# Altium PCB ICtester.PcbDoc
Units mm, origin at the board's own origin, x right, y up, seen from the top; angles counter-clockwise.
Board outline 80 x 137 mm, 2 copper layers (Top Layer, Bottom Layer); 62 components, 66 nets, 300 pads, 47 vias.
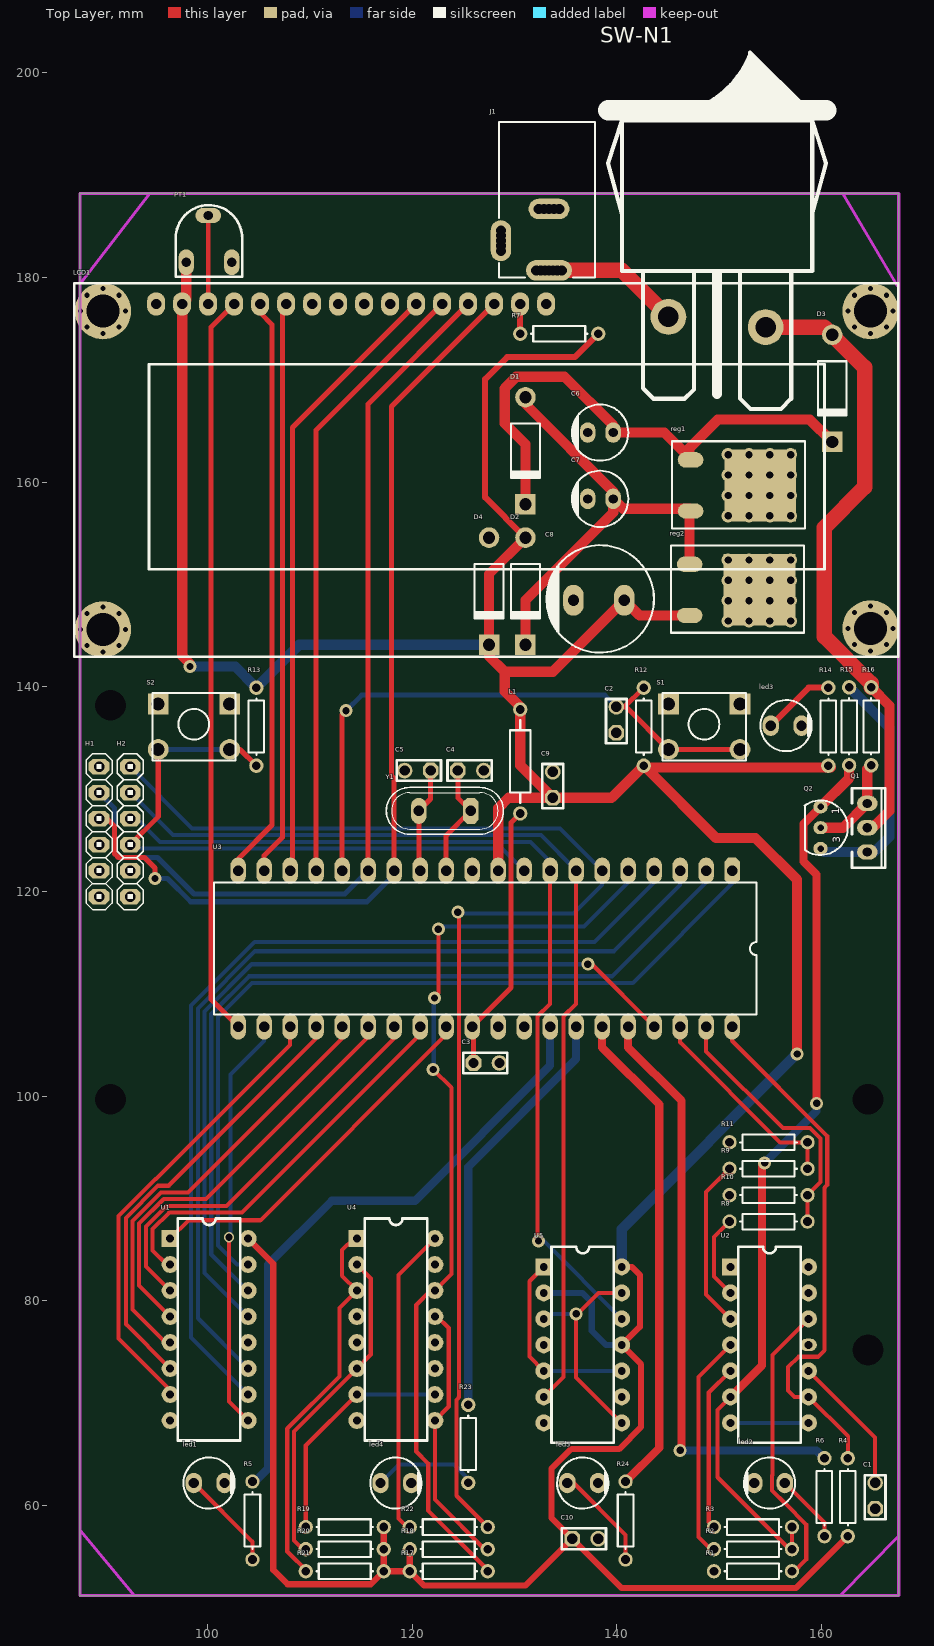
[diagram p0: Top Layer view]
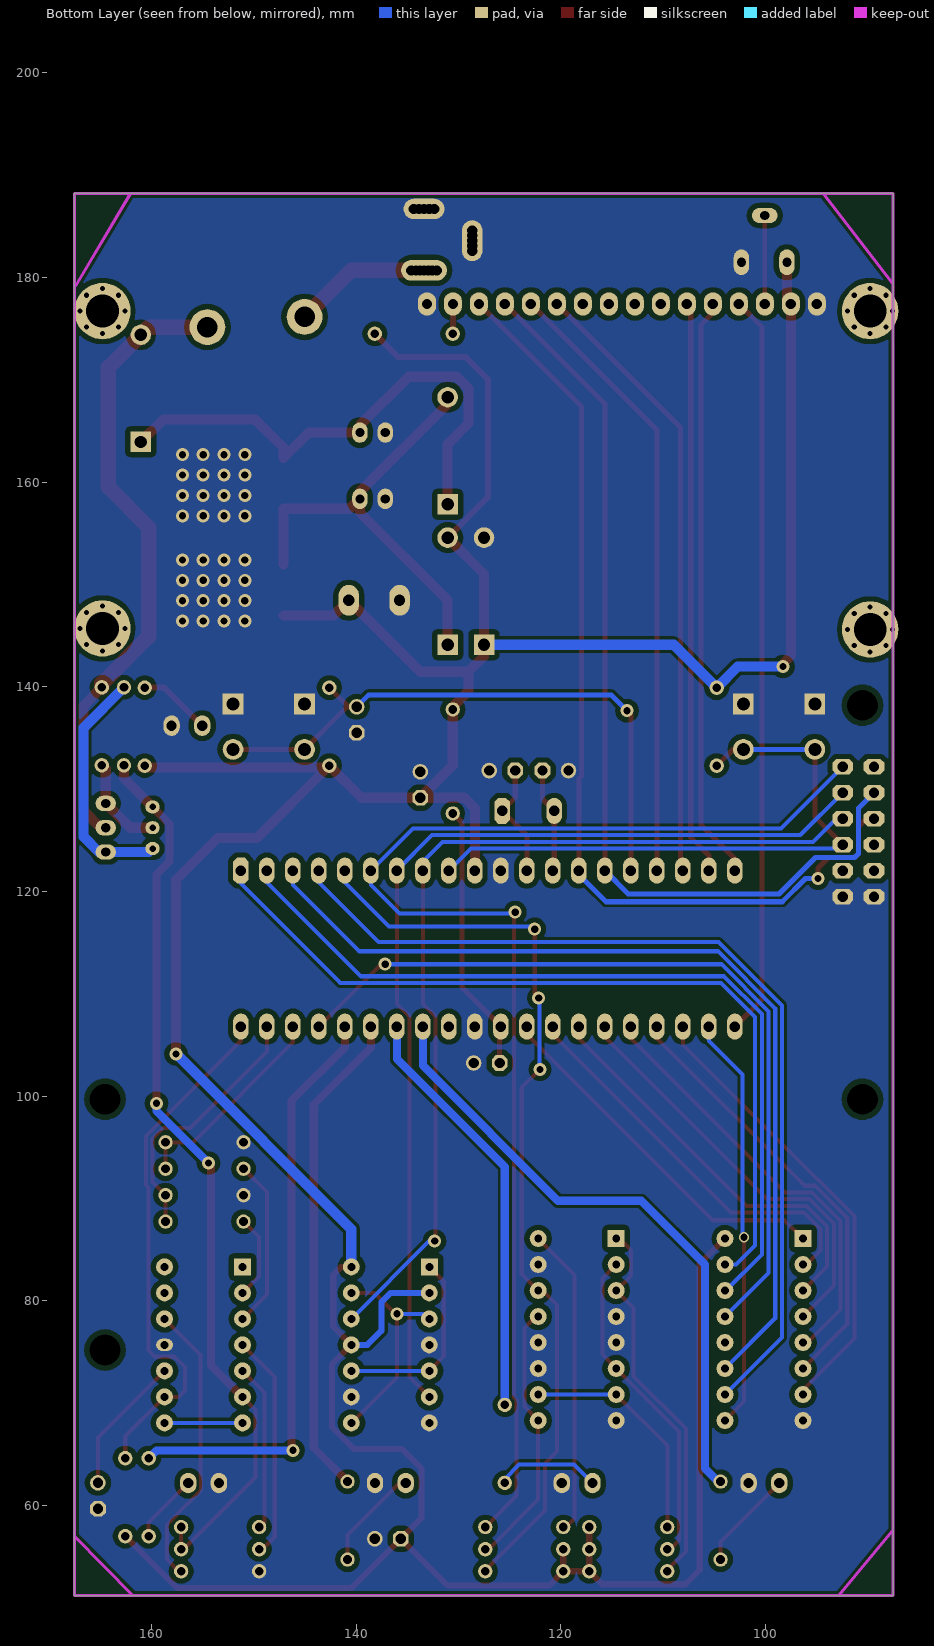
[diagram p1: Bottom Layer view, seen from below]

## Layer stack, top to bottom
Top Solder: solder mask 0.0102, Solder Resist, Dk 3.5
Top Layer: signal copper 0.0356
Dielectric 1: dielectric 0.32, FR-4, Dk 4.8
Bottom Layer: signal copper 0.0356
Bottom Solder: solder mask 0.0102, Solder Resist, Dk 3.5

## Board outline
87.533,51.211 167.533,51.211 167.533,188.211 87.533,188.211

## Design rules (kind name [scope] priority, off if disabled: settings)
Clearance [All] p1: gap=0.254 ignorepadtopadclearanceinfootprint=FALSE except(0: Arc-Hole Track-Hole SMDPad-Hole THPad-Hole Via-Hole Fill-Hole Poly-Hole Region-Hole Text-Hole; 0.3: Arc-Fill Arc-Poly Arc-Region Track-Fill Track-Poly Track-Region; 0.4: SMDPad-Fill SMDPad-Poly SMDPad-Region; 0.5: THPad-Fill THPad-Poly THPad-Region Via-Fill Via-Poly Via-Region)
Height [All] p1 off: minheight=0 maxheight=25.4 prefheight=12.7
PolygonConnect [All] p1: connectstyle=Direct reliefconductorwidth=0.254 reliefentries=4 polygonreliefangle="90 Angle" airgapwidth=0.254
RoomDefinition power2 [InComponentClass('power2')] p1 off: confinementstyle=ConfineIn formatcopy=TRUE lockcomponents=FALSE outline 168.783,163.83 283.972,163.83 283.972,182.499 168.783,182.499
RoomDefinition main [InComponentClass('main')] p2 off: confinementstyle=ConfineIn formatcopy=TRUE lockcomponents=FALSE outline 168.656,78.994 397.256,78.994 397.256,162.687 168.656,162.687
RoomDefinition Az_Proj [InComponentClass('Az_Proj')] p3 off: confinementstyle=ConfineIn formatcopy=TRUE lockcomponents=FALSE outline 168.656,52.705 254.889,52.705 254.889,77.597 168.656,77.597
RoutingVias [All] p1: holewidth=0.711 width=1.27 viastyle="Through Hole" minholewidth=0.711 minwidth=1.27 maxholewidth=0.711 maxwidth=1.27
SolderMaskExpansion [All] p1: expansion=0.102 istentingtop=FALSE
Width [All] p1: maxlimit=2 minlimit=0.254 preferedwidth=0.3
29 further rules are at their usual default settings.

## Classes and differential pairs
component class power2: C6 C7 C8 C9 D1 D2 D3 D4 J1 led3 Q1 Q2 R14 R15 R16 reg1 reg2 SW-N1
component class main: C1 C2 C3 C4 C5 H1 H2 L1 LCD1 led1 led2 PT1 R1 R2 R3 R4 R5 R6 R7 R8 R9 R10 R11 R12 R13 S1 S2 U1 U2 U3 Y1
component class Az_Proj: C10 led4 led5 R17 R18 R19 R20 R21 R22 R23 R24 U4 U5

## Components (designator, comment, footprint, x,y, rotation, side; value= is the part's Value field where it differs from the comment)
C1 "Cap-NF" My_cap100n 165.227,60.96 r90 top value=1uf
C2 "Cap-NF" My_cap100n 139.954,136.779 r90 top value=1uF
C3 "Cap-NF" My_cap100n 127.254,103.251 r0 top value=100nF
C4 "Cap-NF" My_cap100n 125.73,131.826 r0 top value=22pF
C5 "Cap-NF" My_cap100n 120.523,131.826 r180 top value=22pF
C6 "Cap-Polar" Cap-Polar-5.5mm 138.364,164.846 r0 top value=100uF
C7 "Cap-Polar" Cap-Polar-5.5mm 138.364,158.369 r0 top value=100F
C8 "Cap-Polar" Cap-Polar-10.5mm 138.363,148.59 r0 top value=1000uF
C9 "Cap-NF" My_cap100n 133.731,130.429 r90 top value=100nF
C10 "Cap2" My_cap100n 136.906,56.769 r0 top value=100nF
D1 "1N4007" DO-41 131.064,163.068 r270 top
D2 "1N4007" DO-41 131.064,149.352 r270 top
D3 "1N4007" DO-41 161.036,169.164 r270 top
D4 "1N4007" DO-41 127.508,149.352 r270 top
H1 "Header 6" My_1X06 89.408,125.857 r90 top
H2 "Header 6" My_1X06 92.456,125.857 r90 top
J1 "DC_Jack" "Power Jack" 133.366,195.19 r270 top locked
L1 "Inductor" AXIAL-0.4 130.556,132.715 r90 top value=10uH
LCD1 "LCD 16X2" "LCD 16x2" 94.983,177.411 r0 top locked
led1 "LED 5mm" LED-5mm 100.158,62.211 r0 top locked
led2 "LED 5mm" LED-5mm 154.908,62.211 r180 top locked
led3 "LED 5mm" LED-5mm 156.533,136.211 r0 top locked
led4 "LED 5mm" LED-5mm 118.408,62.211 r0 top locked
led5 "LED 5mm" LED-5mm 136.658,62.211 r0 top locked
PT1 "POT3" POT3 96.901,180.086 r0 top
Q1 "bd135" SOT-32 162.965,130.113 r270 top
Q2 "C945" C945 159.893,126.238 r90 top
R1 "Res1" AXIAL-0.3 153.289,53.594 r180 top value=82k
R2 "Res1" AXIAL-0.3 153.289,55.753 r180 top value=22k
R3 "Res1" AXIAL-0.3 153.289,57.912 r180 top value=22k
R4 "Res1" AXIAL-0.3 162.56,60.833 r90 top value=10K
R5 "Res1" AXIAL-0.3 104.394,58.547 r270 top value=330
R6 "Res1" AXIAL-0.3 160.274,60.833 r270 top value=330
R7 "Res1" AXIAL-0.3 134.366,174.498 r180 top value=330
R8 "Res1" AXIAL-0.3 154.813,87.757 r180 top value=10K
R9 "Res1" AXIAL-0.3 154.813,92.922 r180 top value=10K
R10 "Res1" AXIAL-0.3 154.813,90.339 r0 top value=10K
R11 "Res1" AXIAL-0.3 154.813,95.504 r0 top value=10K
R12 "Res1" AXIAL-0.3 142.621,136.113 r90 top value=5.6K
R13 "Res1" AXIAL-0.3 104.775,136.113 r90 top value=10K
R14 "Res1" AXIAL-0.3 160.655,136.113 r90 top value=220
R15 "Res1" AXIAL-0.3 162.687,136.144 r270 top value=10
R16 "Res1" AXIAL-0.3 164.846,136.144 r270 top value=1K
R17 "Res1" AXIAL-0.3 123.571,53.594 r180 top value=1K
R18 "Res1" AXIAL-0.3 123.571,55.753 r180 top value=1K
R19 "Res1" AXIAL-0.3 113.411,57.912 r0 top value=1K
R20 "Res1" AXIAL-0.3 113.411,55.753 r0 top value=1K
R21 "Res1" AXIAL-0.3 113.411,53.594 r0 top value=1K
R22 "Res1" AXIAL-0.3 123.571,57.912 r0 top value=1K
R23 "Res1" AXIAL-0.3 125.476,66.04 r270 top value=330
R24 "Res1" AXIAL-0.3 140.843,58.547 r270 top value=330
reg1 "7808" REG-7805-smd 147.193,159.679 r270 top
reg2 "7805" REG-7805-smd 147.099,149.479 r270 top
S1 "Switch PB" "Switch - Push to On" 148.533,136.113 r0 top locked
S2 "Switch PB" "Switch - Push to On" 98.679,136.113 r0 top
SW-N1 "Switch-1 way" "rocker - switch" 149.784,176.149 r180 top locked
U1 "4017" DIP16 100.158,77.211 r0 top locked
U2 "xr8038" DIP14#1 154.908,75.711 r0 top locked
U3 "ATmega16-16PI" My_40P6 127.127,114.427 r180 top
U4 "CA3083" DIP16 118.408,77.211 r0 top locked
U5 "CD4007CN" DIP14#2 136.658,75.711 r0 top locked
Y1 "CRYSTAL" My_Crystal 123.19,127.889 r180 top

## Footprints (in the part's own frame and the unit in brackets; to place one, negate y for a bottom-side part, rotate by r counter-clockwise, add the part's x,y. Pads: shape width x height; smd on the part's side, far side on the other; paste and mask are expansions set on the pad)
AXIAL-0.3 [mm] "Axial Device, Thru-Hole; 2 Leads; 0.3 in Pin Spacing"
  round 1.4 hole 0.85: 1(-3.81,0) 2(3.81,0)
  silkscreen extent -2.77,-0.76 2.77,0.76
AXIAL-0.4 [mm] "Axial Device, Thru-Hole; 2 Leads; 0.4 in Pin Spacing"
  round 1.4 hole 0.85: 1(-5.08,0) 2(5.08,0)
  silkscreen extent -4.06,-1.02 4.06,1.02
C945 [mil] "NPN Transistor"
  oval 50x55 hole 25: 1(80,0) 2(0,0) 3(-80,0)
  silkscreen extent -105,-105 105,61, body extent -94,-96 95,58, height 315
Cap-Polar-5.5mm [mm]
  oval 1.5x2 hole 0.9: 1(-1.21,0) 2(1.27,0)
  silkscreen extent -2.75,-2.75 2.75,2.75
Cap-Polar-10.5mm [mm]
  oval 2x3 hole 1.1: 1(-2.607,-0.127) 2(2.353,-0.127)
  silkscreen extent -5.25,-5.25 5.25,5.25
DIP14#1 [mil]
  rect 65x65 hole 30: 1(-150,300)
  round 65 hole 30: 2(-150,200) 3(-150,100) 4(-150,0) 5(-150,-100) 6(-150,-200) 7(-150,-300) 8(150,-300) 9(150,-200) 10(150,-100) 12(150,100) 13(150,200) 14(150,300)
  oval 65x47.24 hole 30: 11(150,0)
  silkscreen extent -120,-377 120,377, body extent -155,-384 155,384, height 200
DIP14#2 [mil]
  rect 65x65 hole 30: 1(-150,300)
  round 65 hole 30: 2(-150,200) 3(-150,100) 4(-150,0) 5(-150,-100) 6(-150,-200) 7(-150,-300) 8(150,-300) 9(150,-200) 10(150,-100) 11(150,0) 12(150,100) 13(150,200) 14(150,300)
  silkscreen extent -120,-377 120,377, body extent -155,-384 155,384, height 200
DIP16 [mil]
  rect 65x65 hole 30: 1(-150,350)
  round 65 hole 30: 2(-150,250) 3(-150,150) 4(-150,50) 5(-150,-50) 6(-150,-150) 7(-150,-250) 8(-150,-350) 9(150,-350) 10(150,-250) 11(150,-150) 12(150,-50) 13(150,50) 14(150,150) 15(150,250) 16(150,350)
  silkscreen extent -120,-427 120,427, body extent -155,-394 155,394, height 200
DO-41 [mm] "Diode, Axial; Body 5.2 x 2.7 mm (LxDia. max), Lead Dia. 0.86 mm (max)"
  round 2 hole 1.2: 1(-5.23,0)
  rect 2x2 hole 1.2: 2(5.23,0)
  silkscreen extent -2.65,-1.4 2.75,1.4
"LCD 16x2" [mm] "Character LCD, 2 Row, 16 Colunm"
  oval 1.778x2.286 hole 1.016: 1(0,0) 2(2.54,0) 3(5.08,0) 4(7.62,0) 5(10.16,0) 6(12.7,0) 7(15.24,0) 8(17.78,0) 9(20.32,0) 10(22.86,0) 11(25.4,0) 12(27.94,0) 13(30.48,0) 14(33.02,0) 15(35.56,0) 16(38.1,0)
  round 0.6 hole 0.5: MH(-7.4,-31.8) MH(-7.4,-0.7) MH(-6.756,-33.356) MH(-6.756,-30.244) MH(-6.756,-2.256) MH(-6.756,0.856) MH(-5.2,-34) MH(-5.2,-29.6) MH(-5.2,-2.9) MH(-5.2,1.5) MH(-3.644,-33.356) MH(-3.644,-30.244) MH(-3.644,-2.256) MH(-3.644,0.856) MH(-3,-31.8) MH(-3,-0.7) MH(67.6,-31.7) MH(67.6,-0.7) MH(68.244,-33.256) MH(68.244,-30.144) MH(68.244,-2.256) MH(68.244,0.856) MH(69.8,-33.9) MH(69.8,-29.5) MH(69.8,-2.9) MH(69.8,1.5) MH(71.356,-33.256) MH(71.356,-30.144) MH(71.356,-2.256) MH(71.356,0.856) MH(72,-31.7) MH(72,-0.7)
  round 5.5 hole 3.2: MH(-5.2,-31.8) MH(-5.2,-0.7) MH(69.8,-31.7) MH(69.8,-0.7)
  silkscreen extent -7.99,-34.47 72.51,2.03, body extent -7.99,-34.47 72.51,2.03, height 25.52
LED-5mm [mm]
  oval 1.6x2 hole 1: 1(-1.5,0) 2(1.5,0)
  silkscreen extent -2.5,-2.5 2.5,2.5, body extent -2.47,-3.05 2.98,2.85, height 10.1
My_1X06 [mil]
  oct 60x80 hole 40: 1(-250,0) 2(-150,0) 3(-50,0) 4(50,0) 5(150,0) 6(250,0)
  silkscreen extent -300,-50 300,50
My_40P6 [mil]
  oct 60x100 hole 40: 1(-950,-300)
  oval 60x100 hole 40: 2(-850,-300) 3(-750,-300) 4(-650,-300) 5(-550,-300) 6(-450,-300) 7(-350,-300) 8(-250,-300) 9(-150,-300) 10(-50,-300) 11(50,-300) 12(150,-300) 13(250,-300) 14(350,-300) 15(450,-300) 16(550,-300) 17(650,-300) 18(750,-300) 19(850,-300) 20(950,-300) 21(950,300) 22(850,300) 23(750,300) 24(650,300) 25(550,300) 26(450,300) 27(350,300) 28(250,300) 29(150,300) 30(50,300) 31(-50,300) 32(-150,300) 33(-250,300) 34(-350,300) 35(-450,300) 36(-550,300) 37(-650,300) 38(-750,300) 39(-850,300) 40(-950,300)
  silkscreen extent -1043,-254 1043,254
My_cap100n [mil]
  oct 60x60 hole 40: 1(-50,0)
  round 60 hole 40: 2(50,0)
  silkscreen extent -90,-40 80,40
My_Crystal [mil]
  oct 60x100 hole 40: 1(-100,0)
  oval 60x100 hole 40: 2(100,0)
  silkscreen extent -225,-90 225,90
POT3 [mm]
  oval 1.5x2.5 hole 0.9: 1(1.016,1.397) 2(5.461,1.397)
  oval 2.5x1.5 hole 0.9: 3(3.175,5.969)
  silkscreen extent 0,0 6.48,6.98
"Power Jack" [mm] "Power Adaptor Jack"
  round 1.5 hole 1: 1(14.5,-1.25) 1(14.5,-0.8) 1(14.5,-0.4) 1(14.5,0.4) 1(14.5,0.8) 1(14.5,1.25) 2(8.5,-1) 2(8.5,1) 2(8.5,-0.5) 2(8.5,0.5) 3(10.6,-4.7) 3(11.1,-4.7) 3(12.1,-4.7) 3(12.6,-4.7)
  oval 2x4.5 hole 1: 1(14.5,0)
  oval 2x4 hole 1: 2(8.5,0)
  oval 4x2 hole 1: 3(11.6,-4.7)
  silkscreen extent 0,-4.9 15.2,4.5, body extent 0,-4.9 15.2,4.5, height 11
REG-7805-smd [mm]
  oval 1.5x2.5 smd: 1(-2.5,0) 3(2.5,0)
  rect 7x7 smd: 2(0,6.825)
  silkscreen extent -4.32,-1.82 4.19,11.18
"rocker - switch" [mm]
  round 3.5 hole 2: 1(-4.75,1) 2(4.75,0)
  silkscreen extent -10.65,-25.84 10.65,9
SOT-32 [mm]
  oval 1.5x2 hole 0.9: B(6.25,1.5) C(3.875,1.5) E(1.5,1.5)
  silkscreen extent 0,0 7.8,3.25
"Switch - Push to On" [mil]
  rect 80x80 hole 50: 1(-137.5,87.5) 1(137.5,87.5)
  round 80 hole 50: 2(-137.5,-87.5) 2(137.5,-87.5)
  silkscreen extent -160,-130 160,130, body extent -155,-121 157,123, height 205

## Part data
C1 C2 C3 C4 C5 C9 C10: "Capacitor", Publisher="Altium Limited"
  C1 C2 C3 C4 C5 C9: LatestRevisionDate=17-Jul-2002, LatestRevisionNote="Re-released for DXP Platform.", PackageReference=RAD-0.3, Published=8-Jun-2000
  C10: PackageDescription="Capacitor; 2 Leads", PackageReference=CAPR5-4X5, Published=23-Sep-2002
C6 C7 C8: "Polarized Capacitor (Axial)", LatestRevisionDate=17-Jul-2002, LatestRevisionNote="Re-released for DXP Platform.", PackageReference=POLAR0.8, Published=8-Jun-2000, Publisher="Altium Limited"
D1 D2 D3 D4: "1 Amp Diode"
H1 H2: "Header, 6-Pin", LatestRevisionDate=17-Jul-2002, LatestRevisionNote="Re-released for DXP Platform.", Publisher="Altium Limited"
J1: PackageDocument=2003, ComponentLink1Description="Manufacturer Link", ComponentLink1URL=http://www.cliffuk.co.uk/, DatasheetDocument=2003, DrillAndSlotSize="Corresponds to nominal value.", LatestRevisionDate=15-Jul-2004, LatestRevisionNote="Component Replaced & renamed from \"Phonejack\".", PackageReference=S1VS_SNB, PCB_Layout="Complies with manufacturer's recommendation.", Publisher="Altium Limited"
LCD1: "LCD 16X2 Character lcd"
led1 led2 led3 led4 led5: "Typical LED", Designer="Seyed Mohsen Ghasemian", PackageDescription="LED; 2 Leads", PackageReference=LED, Published=07/31/2012, Publisher=www.picpars.com
PT1: "Variable Potentiometer top adjust", Designer="Seyed Mohsen Ghasemian", WEB=www.picpars.com
Q1: library part C945, "NPN Transistor", Company="IPA CO", Designer="Saeid Jorablo", Last Update Time=2008/08/04
Q2: "NPN Transistor", Company="IPA CO", Designer="Saeid Jorablo", Last Update Time=2008/08/04
R1 R2 R3 R4 R5 R6 R7 R8 R9 R10 R11 R12 R13 R14 R15 R16 R17 R18 R19 R20 R21 R22 R23 R24: "Resistor", LatestRevisionDate=17-Jul-2002, LatestRevisionNote="Re-released for DXP Platform.", PackageDescription="Axial Device, Thru-Hole; 2 Leads; 0.3 in Pin Spacing", PackageReference=AXIAL-0.3, Published=8-Jun-2000, Publisher="Altium Limited"
reg1: library part 7805, "Regulator"
reg2: "Regulator"
S1 S2: "Push Button Switch"
U3: "AVR 16K Bytes of In-System Programmable Flash Memory", ComponentLink1Description="Manufacturer Link", ComponentLink1URL=http://www.atmel.com, ComponentLink2Description=Datasheet, ComponentLink2URL=http://www.atmel.com/dyn/resources/prod_documents/doc2466.pdf, DatasheetVersion=2466E-AVR-10/02, LatestRevisionDate=04-Mar-2005, LatestRevisionNote="Stylized 3D Model Added.", PackageDescription="DIP; 40 Leads; Row Spacing 15.24 mm; Pitch 2.54 mm", PackageReference=40P6, PackageVersion=Dec-1999, Published=17-Sep-2003, Publisher="Altium Limited"
U5: "Dual Complementary Pair Plus Inverter", ComponentLink1Description="Manufacturer Link", ComponentLink1URL=http://www.fairchildsemi.com/, DatasheetVersion=Jan-1999, LatestRevisionDate=29-May-2009, LatestRevisionNote="Component Body Added.", PackageDescription="DIP, 14-Pin, Row Spacing 7.62 mm, Pitch 2.54 mm", PackageReference=N14A, PackageVersion=2000, Published=17-Jul-2002, Publisher="Altium Limited"
Y1: "Crystal"
L1: Code_IEC=1005, Code_JEITA=0402, LatestRevisionDate=29-May-2009, LatestRevisionNote="IPC-7351 Footprint Added.", PackageDescription="Chip Inductor", PackageReference=0402-A, Published=8-Jun-2000, Publisher="Altium Limited"

## Free pads (board coordinates)
  round 0 hole 3: sc(90.533,99.711) sc(90.533,138.211) sc(164.533,75.211) sc(164.533,99.711)

## Via types
v1: diameter 1.27, hole 0.711, Top Layer to Bottom Layer, tented both sides, 46 vias
v2: diameter 1, hole 0.711, Top Layer to Bottom Layer, tented both sides, 1 vias

## Nets (pads, with @x,y where several pads share a name; then routed paths per layer and width w, separated by ;. In a path a pad name is that pad's centre, name@x,y a point inside that pad or via, vN(x,y) a via of type N, cw(c..) or ccw(c..) an arc to the next point about the centre after c; other vN are vias at no path point)
12V: D3.1 Q1.C R16.1 SW-N1.1 | length 61.7
  Top Layer w1: Q1.C 164.978,126.238 166.629,127.889 166.629,138.171 R16.1
  Top Layer w1.5: SW-N1.1 160.281,175.149 D3.1 164.211,171.219 164.211,159.512 160.274,155.575 160.274,144.911 164.846,140.339 R16.1
4017_clock: U1.14 U3.2 | length 83.4
  Bottom Layer w0.4: U1.14 103.891,81.021 100.365,84.547 100.365,108.021 104.069,111.725 139.538,111.725 148.717,120.904 U3.2
4017_en: U1.13 U3.37 | length 79.9
  Top Layer w0.4: v1(137.16,112.903) 137.541,112.903 U3.37
  Bottom Layer w0.4: U1.13 99.711,82.738 99.711,108.292 104.322,112.903 v1(137.16,112.903)
4017_reset: U1.15 U3.1 | length 83
  Bottom Layer w0.4: U1.15 102.875,83.561 101.019,85.417 101.019,107.75 104.34,111.071 141.551,111.071 151.257,120.777 U3.1
B2: R21.1 U4.1 U4.3 | length 37.9
  Top Layer w0.4: R21.1@109.855,53.213 109.855,53.467 107.793,55.529 107.793,67.521 112.903,72.631 112.903,79.326 U4.3 113.157,82.462 113.157,84.963 114.295,86.101 U4.1
B3: R20.1 U4.2 U4.6 | length 32.3
  Top Layer w0.4: R20.1@109.601,55.435 108.447,56.59 108.447,67.25 U4.6 115.951,74.754 115.951,82.208 U4.2
B4: R19.1 U4.7 U4.10 | length 22.6
  Top Layer w0.4: R19.1 109.601,65.864 U4.7
  Bottom Layer w0.4: U4.7 U4.10
B5: R18.1 U4.9 U4.13 | length 26.4
  Top Layer w0.4: U4.13 122.433,78.481 123.571,77.343 123.571,69.674 U4.9 122.218,60.598 R18.1@127.381,55.435
B135: Q1.E Q2.2 R16.2 | length 9.4
  Top Layer w1: Q2.2 162.088,126.238 164.463,128.613 Q1.E 164.465,131.953 R16.2
D1: LCD1.11 U3.18 | length 60.5
  Top Layer w0.5: U3.18 108.315,122.285 108.315,165.343 LCD1.11
D2: LCD1.12 U3.17 | length 60.5
  Top Layer w0.5: U3.17 110.617,165.105 LCD1.12
D3: H1.5 LCD1.13 U3.15 | length 93.4
  Top Layer w0.5: U3.15 115.697,167.645 LCD1.13
  Bottom Layer w0.5: H1.5 90.932,128.143 90.932,123.698 91.313,123.317 95.123,123.317 98.679,119.761 113.411,119.761 U3.15
D4: H1.4 LCD1.14 U3.14 | length 95.2
  Top Layer w0.5: H1.4 89.789,127.508 90.932,126.365 90.932,123.698 91.313,123.317 93.095,123.317 93.091,123.321 93.849,123.321 94.869,122.301 v1(94.869,121.285) ; U3.14 118.237,131.052 117.987,131.302 117.987,167.395 LCD1.14
  Bottom Layer w0.5: v1(94.869,121.285) 96.089,121.285 98.367,119.007 115.578,119.007 117.856,121.285 U3.14@117.856,121.666
E135: Q1.B Q2.3 R15.1 | length 23.7
  Bottom Layer w1: Q2.3 160.236,123.863 Q1.B 165.138,123.863 166.629,125.354 166.629,136.012 R15.1
En: LCD1.6 U3.19 | length 56.4
  Top Layer w0.5: U3.19 105.537,123.521 107.315,125.299 107.315,177.038 LCD1.6@107.823,177.546
GND: C1.1 C2.1 C3.2 C4.2 C5.2 C6.1 C7.1 C8.1 C9.2 C10.2 D4.1 H1.1 H2.1 J1.2 J1.3 LCD1.1 LCD1.16 led1.2 led2.2 led3.2 led4.2 led5.2 PT1.2 R1.2 R10.1 R11.1 reg1.2 reg2.2 S1.1 S2.1 U1.8 U2.11 U3.11 U3.31 U4.4 U4.5 U4.8 U4.11 U4.12 U4.15 U5.4 U5.7 U5.9
  other v1: 150.876,146.431 152.908,146.431 154.94,146.431 156.972,146.431 150.876,148.421 152.908,148.421 154.94,148.421 156.972,148.421 150.876,150.41 152.908,150.41 154.94,150.41 156.972,150.41 150.876,152.4 152.908,152.4 154.94,152.4 156.972,152.4 150.876,156.718 152.908,156.718 154.94,156.718 156.972,156.718 150.876,158.708 152.908,158.708 154.94,158.708 156.972,158.708 150.876,160.697 152.908,160.697 154.94,160.697 156.972,160.697 150.876,162.687 152.908,162.687 154.94,162.687 156.972,162.687
Input1: H2.6 R22.2 U3.6 | length 128.5
  Top Layer w0.4: v1(124.46,117.983) 124.587,117.856 124.587,70.593 124.322,70.328 124.322,60.971 R22.2
  Bottom Layer w0.4: H2.6 98.498,126.165 134.439,126.165 U3.6 138.557,120.65 135.763,117.856 124.587,117.856 v1(124.46,117.983)
Input2: H2.5 U3.7 U5.6 | length 99.5
  Top Layer w0.4: U5.6 134.801,72.584 134.801,107.819 136.017,109.035 U3.7
  Bottom Layer w0.4: H2.5 96.612,125.511 132.588,125.511 136.017,122.082 U3.7
led_u1: R5.1 U3.33 | length 61.4
  Bottom Layer w0.8: R5.1 104.648,62.357 105.918,63.627 105.918,83.566 112.141,89.789 120.269,89.789 133.477,102.997 U3.33
led_u2: R6.1 U3.36 | length 58
  Top Layer w0.8: U3.36 141.097,104.775 146.304,99.568 146.304,65.532 v1(146.177,65.405)
  Bottom Layer w0.8: v1(146.177,65.405) 159.512,65.405 R6.1
led_u3: R23.1 U3.34 | length 41.3
  Bottom Layer w0.8: R23.1 125.476,93.091 136.017,103.632 U3.34
led_u4: R24.1 U3.35 | length 48.1
  Top Layer w0.8: U3.35 138.557,104.775 144.145,99.187 144.145,65.659 R24.1
N1: U5.3 U5.8 U5.13 | length 21.2
  Top Layer w0.4: U5.8 136.017,72.542 v1(136.017,78.74) 136.144,78.74 138.195,80.791 U5.13
  Bottom Layer w0.4: U5.3 133.337,78.74 v1(136.017,78.74)
N2: U5.1 U5.5 U5.10 | length 18.9
  Top Layer w0.4: U5.5 131.445,74.574 131.445,81.928 U5.1
  Bottom Layer w0.4: U5.5 U5.10
NetC1_2: C1.2 U2.10 | length 13.6
  Top Layer w0.4: U2.10 165.227,66.662 C1.2
NetC2_2: C2.2 R12.2 S1.2 U3.16 | length 59.7
  Top Layer w0.5: U3.16 113.157,137.287 v1(113.538,137.668) ; C2.2 140.747,138.049 ; R12.2 140.747,138.049 ; S1.2@152.025,133.89 145.04,133.89 140.882,138.049 140.747,138.049
  Bottom Layer w0.5: v1(113.538,137.668) 115.062,139.192 138.811,139.192 C2.2
NetC3_1: C3.1 L1.1 U3.30 | length 26.4
  Top Layer w0.5: C3.1 125.984,106.68 U3.30 129.667,110.617 129.667,126.746 L1.1
NetC4_1: C4.1 U3.12 Y1.1 | length 11.3
  Top Layer w0.5: U3.12 123.317,125.476 Y1.1 124.46,129.159 C4.1
NetC5_1: C5.1 U3.13 Y1.2 | length 10.3
  Top Layer w0.5: U3.13 120.65,122.174 Y1.2 121.793,129.032 C5.1
NetC6_2: C6.2 D1.2 D3.2 reg1.1 | length 51.3
  Top Layer w1: D1.2 131.064,163.703 129.032,165.735 129.032,169.164 130.175,170.307 134.874,170.307 139.634,165.547 C6.2 144.646,164.846 147.099,162.393 147.099,163.355 149.86,166.116 158.854,166.116 D3.2
NetC7_2: C7.2 D1.1 D2.2 reg1.3 reg2.1 | length 44.6
  Top Layer w1: D2.2 131.064,148.463 139.634,157.033 C7.2 ; D1.1 131.064,167.64 139.634,159.07 C7.2 ; reg2.1 147.099,157.393 140.61,157.393 C7.2
NetJ1_1: J1.1 SW-N1.2 | length 13.9
  Top Layer w1.5: J1.1@132.966,180.69 133.366,180.69 133.766,180.69 134.166,180.69 134.616,180.69 140.493,180.69 SW-N1.2
NetLCD1_3: LCD1.3 PT1.3 | length 8.6
  Top Layer w0.4: LCD1.3 100.076,177.424 PT1.3
NetLCD1_15: LCD1.15 R7.2 | length 2.9
  Top Layer w0.6: LCD1.15 130.543,174.511 R7.2
Netled1_1: led1.1 R5.2 | length 9.8
  Top Layer w0.4: led1.1 104.394,56.475 R5.2
Netled2_1: led2.1 R6.2 | length 6.8
  Top Layer w0.4: led2.1 160.274,58.345 R6.2
Netled3_1: led3.1 R14.2 | length 7.2
  Top Layer w0.6: led3.1 158.745,139.923 R14.2
Netled4_1: led4.1 R23.2 | length 10.3
  Bottom Layer w0.4: led4.1 118.705,64.008 124.079,64.008 125.476,62.611 R23.2
Netled5_1: led5.1 R24.2 | length 10.2
  Top Layer w0.4: led5.1 135.782,62.211 140.843,57.15 R24.2
NetR1_1: R1.1 U2.12 | length 28.4
  Top Layer w0.4: R1.1@157.099,53.34 158.496,54.737 158.496,58.166 156.464,60.198 156.448,60.198 155.154,61.492 155.154,62.97 155.194,63.01 155.194,74.727 U2.12
NetR2_2: R2.2 U2.4 | length 22.2
  Top Layer w0.4: R2.2@149.479,55.435 147.955,56.959 147.955,72.568 U2.4
NetR3_2: R3.2 U2.5 | length 16.4
  Top Layer w0.4: R3.2 148.971,58.42 148.971,71.044 U2.5
NetR8_2: R8.2 U2.2 | length 8.3
  Top Layer w0.4: R8.2 149.479,86.233 149.479,82.41 U2.2
NetR9_2: R9.2 U2.3 | length 16.6
  Top Layer w0.4: R9.2 148.717,90.636 148.717,80.632 U2.3
NetR22_1: R22.1 U4.16 | length 30.8
  Top Layer w0.4: R22.1 120.015,58.166 119.253,58.166 118.654,58.765 118.654,82.537 U4.16
NetU2_7: U2.7 U2.8 | length 7.7
  Bottom Layer w0.4: U2.7 158.642,68.091 U2.8@158.75,68.199
Output1: R17.1 U3.5 U4.14 | length 89.3
  Top Layer w0.4: v1(122.047,102.616) 123.825,100.838 123.825,82.628 U4.14 121.807,81.021 120.396,79.61 120.396,65.278 121.564,64.11 121.564,59.538 127.381,53.721 R17.1 ; v1(122.174,109.601) 122.174,109.728 122.555,110.109 v1(122.555,116.332)
  Bottom Layer w0.4: v1(122.047,102.616) 122.101,102.67 122.101,109.528 v1(122.174,109.601) ; v1@122.936,116.586 136.779,116.586 141.097,120.904 U3.5
Output2: H2.4 U3.8 U5.12 | length 91.7
  Top Layer w0.4: v1(132.334,85.852) 132.334,86.233 132.261,86.306 132.261,107.819 133.477,109.035 U3.8
  Bottom Layer w0.4: H2.4 93.091,127.127 95.361,124.857 131.556,124.857 133.477,122.936 U3.8 ; v1(132.334,85.852) 132.867,85.852 U5.12
Q0: U1.3 U3.27 | length 40.3
  Top Layer w0.4: U1.3 93.98,83.389 93.98,87.285 95.995,89.3 101.873,89.3 118.237,105.664 U3.27
Q1: U1.2 U3.28 | length 39.1
  Top Layer w0.4: U1.2 96.017,83.561 94.634,84.944 94.634,87.014 96.266,88.646 103.378,88.646 120.777,106.045 U3.28
Q2: U1.4 U3.26 | length 41.3
  Top Layer w0.4: U1.4 93.326,81.503 93.326,87.556 95.724,89.954 99.86,89.954 115.697,105.791 U3.26
Q3: U1.7 U3.23 | length 45
  Top Layer w0.4: U1.7 96.348,71.292 91.313,76.327 91.313,88.317 94.912,91.916 94.964,91.916 108.077,105.029 U3.23
Q4: U1.10 U3.4 | length 91.7
  Bottom Layer w0.4: U1.10 98.403,76.426 98.403,108.853 104.612,115.062 137.795,115.062 143.637,120.904 U3.4
Q5: U1.1 U3.29 | length 36
  Top Layer w0.4: U1.1 98.131,87.884 105.156,87.884 123.317,106.045 U3.29
Q6: U1.5 U3.25 | length 42.7
  Top Layer w0.4: U1.5 95.89,75.941 92.672,79.159 92.672,87.827 95.453,90.608 98.101,90.608 113.157,105.664 U3.25
Q7: U1.6 U3.24 | length 43.5
  Top Layer w0.4: U1.6 92.018,77.731 92.018,88.098 95.182,91.262 96.215,91.262 110.617,105.664 U3.24
Q8: U1.9 U3.22 | length 40.7
  Top Layer w0.4: v2(102.108,86.233) 102.108,70.181 U1.9
  Bottom Layer w0.4: v2(102.108,86.233) 102.254,86.379 102.254,102.127 105.537,105.41 U3.22
Q9: U1.11 U3.3 | length 90.7
  Bottom Layer w0.4: U1.11 99.057,78.312 99.057,108.582 104.648,114.173 139.7,114.173 146.177,120.65 U3.3
RS: LCD1.4 U3.21 | length 72.7
  Top Layer w0.5: LCD1.4 100.33,175.138 100.33,109.474 U3.21
rst: H2.3 R13.1 S2.2 U3.9 | length 60.2
  Top Layer w0.5: H2.3 95.186,127.317 S2.2@95.186,133.89 ; S2.2@102.171,133.89 103.188,133.89 R13.1
  Bottom Layer w0.4: H2.3 92.84,124.203 128.781,124.203 U3.9
  Bottom Layer w0.5: S2.2@95.186,133.89 S2.2@102.171,133.89
Rw: LCD1.5 U3.20 | length 57.2
  Top Layer w0.5: U3.20 102.997,123.19 106.299,126.492 106.299,175.387 105.143,176.543 LCD1.5
sin: R8.1 R10.2 U3.39 | length 25.8
  Top Layer w0.4: U3.39 148.717,104.394 156.21,96.901 158.858,96.901 159.893,95.866 159.893,91.609 R10.2 R8.1
Square: R4.2 U2.9 U3.40 | length 51.9
  Top Layer w0.4: U3.40 151.257,105.427 160.547,96.137 160.547,91.338 160.274,91.065 160.274,75.184 159.639,74.549 157.734,74.549 156.718,73.533 156.718,71.247 157.334,70.631 U2.9 162.56,66.789 R4.2
triangle: R9.1 R11.2 U3.38 | length 20.6
  Top Layer w0.4: U3.38 146.177,105.283 155.956,95.504 R11.2 R9.1
VCC: C8.2 C9.1 C10.1 D2.1 D4.2 L1.2 LCD1.2 PT1.1 R4.1 R7.1 R12.1 R13.2 R14.1 R17.2 R18.2 R19.2 R20.2 R21.2 reg2.3 U1.16 U3.10 U5.2 U5.11 U5.14 | length 408.9
  Top Layer w0.6: U1.16 106.426,83.643 106.426,53.721 107.823,52.324 115.951,52.324 R21.2 ; R19.2 R20.2 R21.2 ; R18.2@119.761,55.435 R17.2 ; D2.1 127.127,158.519 127.127,170.053 129.286,172.212 135.89,172.212 R7.1 ; U5.14 141.459,83.331 142.24,82.55 142.24,77.483 U5.11 142.367,73.812 142.367,67.691 140.208,65.532 135.509,65.532 133.604,63.627 133.604,58.801 C10.1 ; R4.1 157.48,51.943 140.462,51.943 C10.1 ; R21.2 R17.2 ; R17.2 121.158,52.197 131.064,52.197 C10.1
  Top Layer w1: PT1.1 97.917,177.805 LCD1.2 97.523,143.015 98.298,142.24 v1(98.298,141.986) ; U3.10 128.397,128.143 129.413,129.159 C9.1 ; D2.1 127.508,151.026 D4.2 127.508,143.002 129.032,141.478 ; reg2.3 142.2,146.979 C8.2 133.731,141.478 129.032,141.478 ; v1(157.607,104.14) 157.607,121.158 153.543,125.222 149.702,125.222 R12.1@142.804,132.12 ; R14.1@160.909,132.12 R12.1@142.804,132.12 ; 129.032,141.478 129.032,139.573 130.556,138.049 L1.2 130.556,132.334 C9.1 ; C9.1 139.477,129.159 R12.1 R12.1@142.804,132.12
  Bottom Layer w0.6: U5.2 136.633,80.791 137.541,79.883 137.541,77.089 138.919,75.711 U5.11
  Bottom Layer w1: v1(98.298,141.986) 102.712,141.986 R13.2 108.974,144.122 D4.2 ; U5.14 140.468,87.025 157.583,104.14 v1(157.607,104.14)
VCC-8038: Q2.1 R2.1 R3.1 R15.2 U2.6 | length 88.9
  Top Layer w0.4: U2.6 149.819,69.351 149.819,62.779 R2.1@157.099,55.499 ; R3.1 R2.1 R2.1@157.099,55.499 ; R2.1@157.353,55.435 157.162,55.435 R2.1@157.099,55.499
  Top Layer w0.8: U2.6 154.178,73.711 154.178,93.218 v1(154.432,93.472) ; v1(159.512,99.314) 159.512,121.666 158.242,122.936 158.242,126.619 Q2.1
  Top Layer w1: Q2.1 162.687,131.064 R15.2
  Bottom Layer w0.8: v1(154.432,93.472) 159.512,98.552 v1(159.512,99.314)
pads on no net: H1.2 H1.3 H1.6 H2.2 LCD1.7 LCD1.8 LCD1.9 LCD1.10 LCD1.MH U1.12 U2.1 U2.13 U2.14 U3.32

## Polygon pours and split planes (outlines as drawn)
GND on Bottom Layer "Bottom Layer-No Net" (solid, remove dead copper, pour order 0): 94.361,188.211 167.533,188.211 167.533,51.211 87.533,51.211 87.533,188.211

## Keep-outs
Keep-Out Layer:
  lines w0.3: 87.63,57.531 92.837,51.211 ; 87.63,179.451 94.361,188.211 ; 161.798,51.211 167.513,57.023 ; 162.052,188.214 167.386,179.197 ; 87.533,51.211 87.533,188.211 167.533,188.211 167.533,51.211 87.533,51.211

## Text inside footprints (layer, text, board x,y; h text height)
Q2: Top Overlay "1" at 161.703,127.533 h0.7 r90; Top Overlay "3" at 161.798,124.765 h0.7 r90